# EAGLE board OrangeCamelFull (EAGLE 8.4.1)
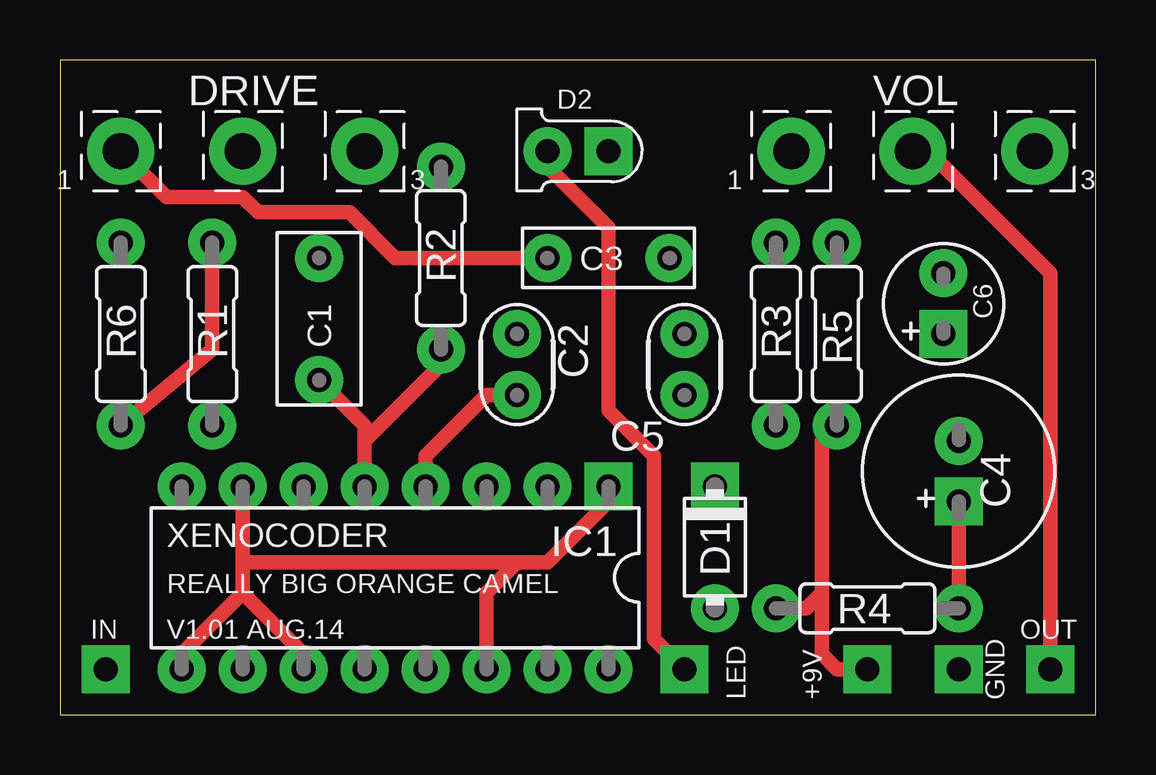
[diagram p0: board, top side]
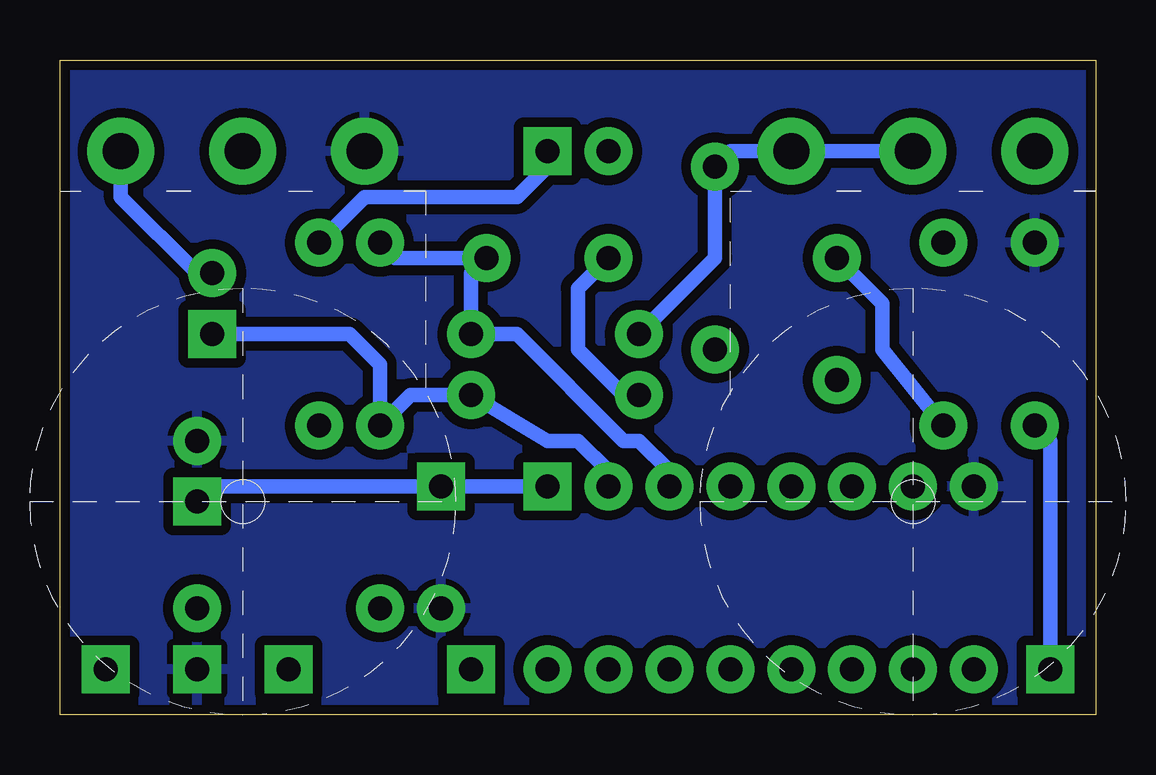
[diagram p1: board, bottom side, seen from below]

Size 43.18 x 27.3 mm. Coordinates in mm from the lower left corner, seen from the top.
Outline: 0,0 43.18,0 43.18,27.3 0,27.3 0,0
Copper layers (1*16): Top 0.0356mm / dielectric 1.5011mm / Bottom 0.0356mm
Design rules "LaenPCBOrder": minimum track width 6mil, minimum drill 13mil, track to track 6mil, track to pad 6mil, pad to pad 6mil, via to via 6mil, smd to smd 6mil, copper to edge 15mil, drill to drill 6mil, minimum pad ring 7mil, minimum via ring 7mil, stop-mask expansion 3mil, vias tented up to drill 0mil, thermal gap 10mil

## Footprints (pad centres in the part's own frame; a part is rotated, then mirrored left to right if it is on the bottom)
SQUARE = drill 1 pad 2 square: 1 0,0
072X035 = drill 1 pad 2: 1 -2.54,0; 2 2.54,0
050X030_025 = drill 1 pad 2: 1 -1.27,0; 2 1.27,0
072X025 = drill 1 pad 2: 1 -2.54,0; 2 2.54,0
080_035_1 = drill 1 pad 2 square: + -1.27,0 | drill 1 pad 2: - 1.27,0
050_020_1 = drill 1 pad 2 square: + -1.27,0 | drill 1 pad 2: - 1.27,0
DO41-2 = drill 1 pad 2: A 2.54,0 | drill 1 pad 2 square: C -2.54,0
LED3MM = drill 1 pad 2 square: A -1.27,0 | drill 1 pad 2: K 1.27,0
16MM = drill 1.5 pad 2.794: 1 5.08,0; 2 0,0; 3 -5.08,0
DIL16 = drill 1 pad 2 square: 1 -8.89,-3.81 | drill 1 pad 2: 2 -6.35,-3.81; 3 -3.81,-3.81; 4 -1.27,-3.81; 5 1.27,-3.81; 6 3.81,-3.81; 7 6.35,-3.81; 8 8.89,-3.81; 9 8.89,3.81; 10 6.35,3.81; 11 3.81,3.81; 12 1.27,3.81; 13 -1.27,3.81; 14 -3.81,3.81; 15 -6.35,3.81; 16 -8.89,3.81
R0207/3 = drill 1 pad 2: 1 -3.81,0; 2 3.81,0

## Placement (x,y rotation side)
+9V  +9V(T)  [SQUARE]  33.66,1.91 0 top
C1  0.068uF  [072X035]  10.79,16.51 90 top
C2  51pF  [050X030_025]  19.05,14.61 270 top
C3  0.033uF  [072X025]  22.86,19.05 0 top
C4  330uF  [080_035_1]  37.47,10.16 90 top
C5  100pF  [050X030_025]  26.04,14.61 270 top
C6  10uF  [050_020_1]  36.83,17.14 90 top
D1  1N4001  [DO41-2]  27.3,6.99 270 top
D2  LED3MM  [LED3MM]  21.59,23.5 180 top
DRIVE  B1M  [16MM]  7.62,23.5 180 top
GND  GND(T)  [SQUARE]  37.47,1.91 0 top
IC1  CD4049UBE  [DIL16]  13.97,5.71 180 top
IN  IN(T)  [SQUARE]  1.91,1.91 0 top
LED  [SQUARE]  26.04,1.91 0 top
OUT  OUT(T)  [SQUARE]  41.27,1.91 0 top
R1  100k  [R0207/3]  6.35,15.88 270 top
R2  100k  [R0207/3]  15.88,19.05 270 top
R3  1M  [R0207/3]  29.84,15.88 270 top
R4  1K  [R0207/3]  33.66,4.45 0 top
R5  4k7  [R0207/3]  32.38,15.88 90 top
R6  1.5M  [R0207/3]  2.54,15.88 270 top
VOL  A10K  [16MM]  35.56,23.5 180 top

## Library data of the parts
+9V GND IN LED OUT = mb_supply
C1 C3 = mb_caps-box
C2 C5 = mb_caps-ceramic
C4 C6 = mb_caps-electro
D1 D2 = mb_diodes
DRIVE VOL = mb_pots
IC1 = mb_ics
R1-R6 = mb_resistors

## Nets
+9V: +9V.1 R4.1 R5.1
GND: C4.- D1.A GND.1 IC1.8 R6.1 VOL.1
IN: IN.1 R1.1 R6.2
N$1: C4.+ D1.C IC1.1 IC1.7 IC1.9 IC1.11 IC1.14 R4.2
N$2: D2.K LED.1
N$3: D2.A R5.2
N$4: C1.2 R1.2
N$5: C1.1 IC1.5 R2.2
N$6: C2.2 C3.1 DRIVE.1 IC1.4
N$7: C3.2 C5.1 IC1.3 R3.1
N$8: C5.2 C6.+ IC1.2 R3.2
N$9: C6.- VOL.3
N$10: OUT.1 VOL.2
N$11: C2.1 DRIVE.2 DRIVE.3 R2.1

## Tracks (layer width: path | path; a pad name or v marks a point on that pad's centre or on a via)
+9V
  Top 0.61: R5.1 31.75,11.43 31.75,5.08 | 31.75,5.08 31.75,2.54 32.38,1.91 +9V.1 | R4.1 31.11,4.45 31.75,5.08
GND
  pour Bottom (isolate 0.406): 0,26.67 43.18,26.67 43.18,0 0,0
IN
  Top 0.61: R6.2 6.35,15.24 R1.1
  Bottom 0.61: IN.1 1.91,11.43 R6.2
N$1
  Top 0.61: IC1.9 5.08,2.54 7.62,5.08 | 7.62,5.08 7.62,6.35 | 7.62,6.35 IC1.7 | IC1.11 10.16,2.54 7.62,5.08 | IC1.1 22.86,8.89 20.32,6.35 19.05,6.35 | 19.05,6.35 7.62,6.35 | IC1.14 17.78,5.08 19.05,6.35 | R4.2 C4.+
  Bottom 0.61: IC1.1 D1.C 36.83,9.53 C4.+
N$2
  Top 0.61: LED.1 24.77,3.17 24.77,10.79 22.86,12.7 22.86,20.32 20.32,22.86 D2.K
N$3
  Bottom 0.61: R5.2 30.48,21.59 24.13,21.59 22.86,22.86 D2.A
N$4
  Bottom 0.61: R1.2 8.89,15.24 8.89,17.14 C1.2
N$5
  Top 0.61: IC1.5 12.7,11.43 | 12.7,11.43 12.7,12.06 C1.1 | R2.2 15.88,14.61 12.7,11.43
N$6
  Top 0.61: IC1.4 15.24,10.79 17.78,13.34 C2.2 | C3.1 13.97,19.05 12.06,20.95 8.26,20.95 7.62,21.59 4.45,21.59 DRIVE.1
  Bottom 0.61: C3.1 21.59,17.78 21.59,15.24 19.68,13.34 C2.2
N$7
  Bottom 0.61: IC1.3 17.78,10.16 19.05,11.43 19.68,11.43 24.13,15.88 C5.1 26.04,18.41 C3.2 29.21,19.05 R3.1
N$8
  Bottom 0.61: IC1.2 20.32,10.16 21.59,11.43 22.86,11.43 C5.2 28.57,13.34 R3.2 29.84,14.61 31.11,15.88 C6.+
N$9
  Bottom 0.61: C6.- 37.47,18.41 40.64,21.59 VOL.3
N$10
  Top 0.61: OUT.1 41.27,18.41 36.2,23.5 VOL.2
N$11
  Bottom 0.61: C2.1 15.88,19.05 R2.1 15.24,23.5 DRIVE.3 DRIVE.2

## Text on the board
tNames: XENOCODER | REALLY BIG ORANGE CAMEL | V1.01 AUG.14